# Allegro board Swapback_example.brd
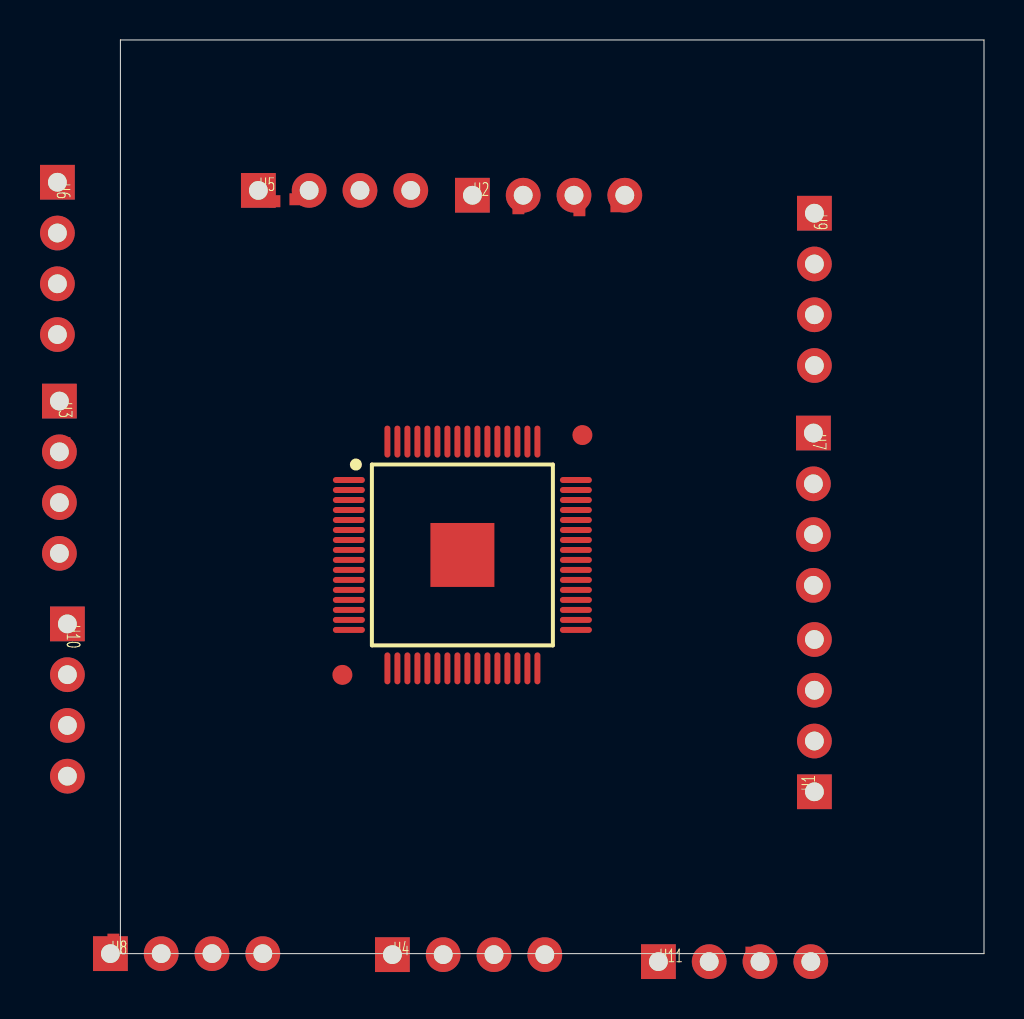
[diagram p0: board, top side]
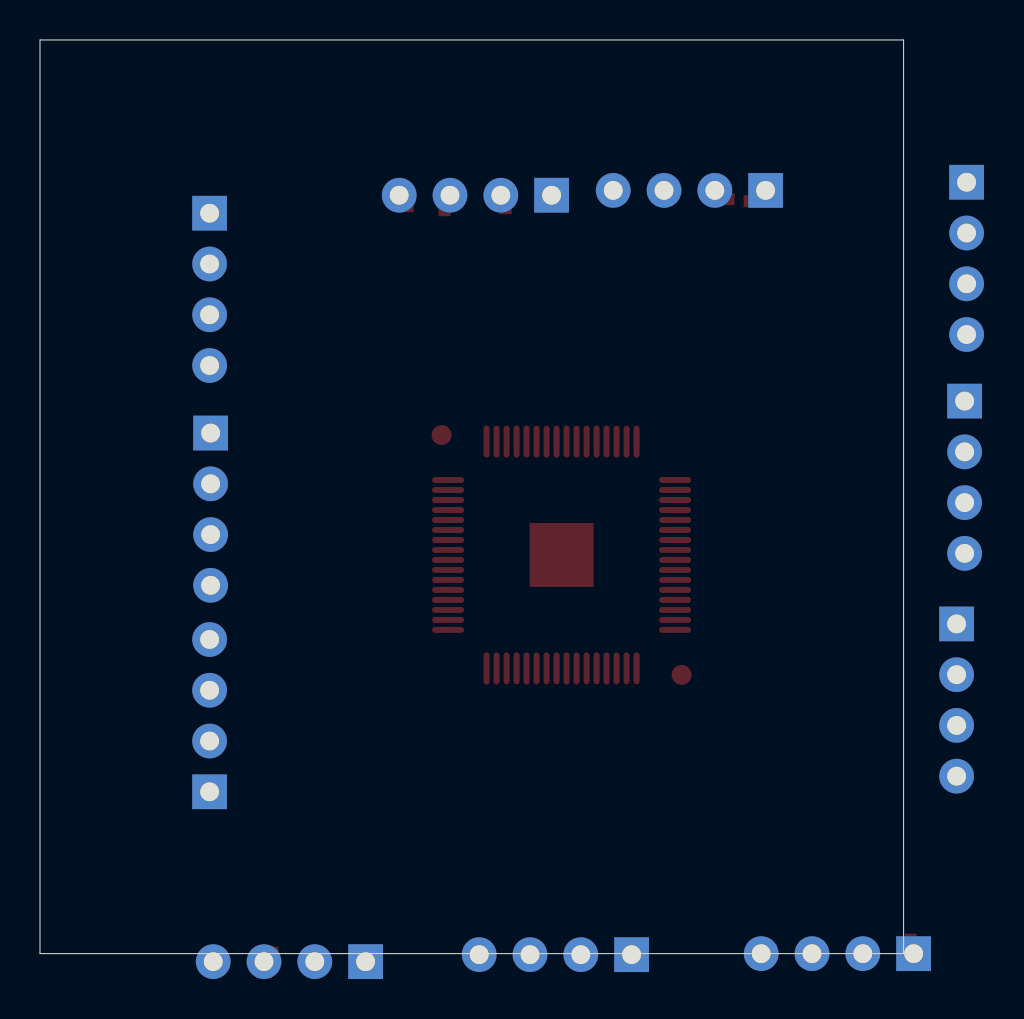
[diagram p1: board, bottom side, seen from below]

Outline 43.18 x 45.72 mm; copper layers: TOP, BOTTOM. Coordinates in mm from the lower left corner of the outline.
Outline path: 0,45.72 0,0 43.18,0 43.18,45.72 0,45.72

## Placement (name value [footprint] x y rotation side)
H1  M20-8890445  [UNASSIGNED]  34.7 8.1 90 top
H2  M20-8890445  [UNASSIGNED]  17.6 37.95 0 top
H3  M20-8890445  [UNASSIGNED]  -3.05 27.65 270 top
H4  M20-8890445  [UNASSIGNED]  13.6 -0.05 0 top
H5  M20-8890445  [UNASSIGNED]  6.9 38.19 0 top
H6  M20-8890445  [UNASSIGNED]  -3.15 38.6 270 top
H7  M20-8890445  [UNASSIGNED]  34.65 26.05 270 top
H8  M20-8890445  [UNASSIGNED]  -0.5 0 0 top
H9  M20-8890445  [UNASSIGNED]  34.7 37.05 270 top
H10  M20-8890445  [UNASSIGNED]  -2.65 16.5 270 top
H11  M20-8890445  [UNASSIGNED]  26.9 -0.4 0 top
TP1  TP .25mm noV  [TESTPAD_P25MM_NOVIA]  24.8 37.4 0 top
TP2  TP .25mm noV  [TESTPAD_P25MM_NOVIA]  22.95 37.2 0 top
TP3  TP .25mm noV  [TESTPAD_P25MM_NOVIA]  19.9 37.3 0 top
TP4  TP .25mm noV  [TESTPAD_P25MM_NOVIA]  17.7 38 0 top
TP5  TP .25mm noV  [TESTPAD_P25MM_NOVIA]  14.5 37.8 0 top
TP6  TP .25mm noV  [TESTPAD_P25MM_NOVIA]  8.75 37.75 0 top
TP7  TP .25mm noV  [TESTPAD_P25MM_NOVIA]  7.7 37.65 0 top
TP8  TP .25mm noV  [TESTPAD_P25MM_NOVIA]  -2.9 38.8 0 top
TP9  TP .25mm noV  [TESTPAD_P25MM_NOVIA]  -2.85 36.15 0 top
TP10  TP .25mm noV  [TESTPAD_P25MM_NOVIA]  -2.85 33.6 0 top
TP11  TP .25mm noV  [TESTPAD_P25MM_NOVIA]  -3.3 31 0 top
TP12  TP .25mm noV  [TESTPAD_P25MM_NOVIA]  -2.9 27.7 0 top
TP13  TP .25mm noV  [TESTPAD_P25MM_NOVIA]  -2.8 25.55 0 top
TP14  TP .25mm noV  [TESTPAD_P25MM_NOVIA]  -3.2 22.45 0 top
TP15  TP .25mm noV  [TESTPAD_P25MM_NOVIA]  -2.8 20.1 0 top
TP16  TP .25mm noV  [TESTPAD_P25MM_NOVIA]  -2.85 16.4 0 top
TP17  TP .25mm noV  [TESTPAD_P25MM_NOVIA]  -2.6 13.95 0 top
TP18  TP .25mm noV  [TESTPAD_P25MM_NOVIA]  -2.55 11.3 0 top
TP19  TP .25mm noV  [TESTPAD_P25MM_NOVIA]  -2.8 8.75 0 top
TP20  TP .25mm noV  [TESTPAD_P25MM_NOVIA]  -0.35 0.7 0 top
TP21  TP .25mm noV  [TESTPAD_P25MM_NOVIA]  2.05 0.3 0 top
TP22  TP .25mm noV  [TESTPAD_P25MM_NOVIA]  4.6 0.35 0 top
TP23  TP .25mm noV  [TESTPAD_P25MM_NOVIA]  7.15 0.25 0 top
TP24  TP .25mm noV  [TESTPAD_P25MM_NOVIA]  13.55 0.4 0 top
TP25  TP .25mm noV  [TESTPAD_P25MM_NOVIA]  16.2 0.3 0 top
TP26  TP .25mm noV  [TESTPAD_P25MM_NOVIA]  18.55 0.35 0 top
TP27  TP .25mm noV  [TESTPAD_P25MM_NOVIA]  21.15 0.45 0 top
TP28  TP .25mm noV  [TESTPAD_P25MM_NOVIA]  31.55 0.05 0 top
TP29  TP .25mm noV  [TESTPAD_P25MM_NOVIA]  34.9 -0.4 0 top
TP30  TP .25mm noV  [TESTPAD_P25MM_NOVIA]  34.8 8 0 top
TP31  TP .25mm noV  [TESTPAD_P25MM_NOVIA]  34.6 10.6 0 top
TP32  TP .25mm noV  [TESTPAD_P25MM_NOVIA]  34.6 13.2 0 top
TP33  TP .25mm noV  [TESTPAD_P25MM_NOVIA]  34.85 15.75 0 top
TP34  TP .25mm noV  [TESTPAD_P25MM_NOVIA]  34.5 18.35 0 top
TP35  TP .25mm noV  [TESTPAD_P25MM_NOVIA]  34.6 20.95 0 top
TP36  TP .25mm noV  [TESTPAD_P25MM_NOVIA]  34.85 23.5 0 top
TP37  TP .25mm noV  [TESTPAD_P25MM_NOVIA]  35.05 26.5 0 top
TP38  TP .25mm noV  [TESTPAD_P25MM_NOVIA]  34.45 29.25 0 top
TP39  TP .25mm noV  [TESTPAD_P25MM_NOVIA]  34.55 31.65 0 top
TP40  TP .25mm noV  [TESTPAD_P25MM_NOVIA]  34.45 34.5 0 top
TP41  TP .25mm noV  [TESTPAD_P25MM_NOVIA]  34.5 37 0 top
U1  TLK2201BIRCPR  [QFP50P1200X1200X120-65N_JUNK]  17.1 19.95 0 top

## Library data of the parts
H1-H11 = HDR_1X4
TP1-TP41 = MINI_TP
U1 = TLK2201B

## Footprints (pads in the part's own frame, mm; a bottom-side part is the same pattern mirrored in y, then rotated)
QFP50P1200X1200X120-65N_JUNK
  round 1 smd: (-6,-6) (6,6)
  oval 1.6x0.3 smd: 1(-5.675,3.75) 2(-5.675,3.25) 3(-5.675,2.75) 4(-5.675,2.25) 5(-5.675,1.75) 6(-5.675,1.25) 7(-5.675,0.75) 8(-5.675,0.25) 9(-5.675,-0.25) 10(-5.675,-0.75) 11(-5.675,-1.25) 12(-5.675,-1.75) 13(-5.675,-2.25) 14(-5.675,-2.75) 15(-5.675,-3.25) 16(-5.675,-3.75) 33(5.675,-3.75) 34(5.675,-3.25) 35(5.675,-2.75) 36(5.675,-2.25) 37(5.675,-1.75) 38(5.675,-1.25) 39(5.675,-0.75) 40(5.675,-0.25) 41(5.675,0.25) 42(5.675,0.75) 43(5.675,1.25) 44(5.675,1.75) 45(5.675,2.25) 46(5.675,2.75) 47(5.675,3.25) 48(5.675,3.75)
  oval 0.3x1.6 smd: 17(-3.75,-5.675) 18(-3.25,-5.675) 19(-2.75,-5.675) 20(-2.25,-5.675) 21(-1.75,-5.675) 22(-1.25,-5.675) 23(-0.75,-5.675) 24(-0.25,-5.675) 25(0.25,-5.675) 26(0.75,-5.675) 27(1.25,-5.675) 28(1.75,-5.675) 29(2.25,-5.675) 30(2.75,-5.675) 31(3.25,-5.675) 32(3.75,-5.675) 49(3.75,5.675) 50(3.25,5.675) 51(2.75,5.675) 52(2.25,5.675) 53(1.75,5.675) 54(1.25,5.675) 55(0.75,5.675) 56(0.25,5.675) 57(-0.25,5.675) 58(-0.75,5.675) 59(-1.25,5.675) 60(-1.75,5.675) 61(-2.25,5.675) 62(-2.75,5.675) 63(-3.25,5.675) 64(-3.75,5.675)
  rect 3.2x3.2 smd: EPAD(0,0)
TESTPAD_P25MM_NOVIA
  rect 0.6x0.6 smd: 1(0,0)
UNASSIGNED
  rect 1.74x1.74 hole 0.94: 1(0,0)
  round 1.74 hole 0.94: 2(2.54,0) 3(5.08,0) 4(7.62,0)

## Nets
GND_SIGNAL: U1.1(GND#1) U1.14(GND#14) U1.21(GND#21) U1.25(GND#25) U1.33(GND#33) U1.46(GND#46) U1.51(GNDA#51) U1.58(GNDA#58) U1.64(GNDPLL) U1.EPAD(GND#EPAD)
VCC: U1.5(VDD#5) U1.10(VDD#10) U1.37(VDD#37) U1.42(VDD#42)
ENABLE: TP26.1 U1.28(ENABLE)
JTDI: TP41.1 U1.48(JTDI)
JTDO: TP25.1 U1.27(JTDO)
JTMS: TP4.1 U1.55(JTMS)
JTRSTN: TP5.1 U1.56(JTRSTN)
LOOPEN: TP21.1 U1.19(LOOPEN)
LOS: TP24.1 U1.26(LOS)
MODSEL: TP18.1 U1.15(MODSEL)
PRBSEN: TP19.1 U1.16(PRBSEN)
RCB0: TP28.1 U1.31(RBC0)
RCB1: TP27.1 U1.30(RBC1)
RCBMODE: TP29.1 U1.32(RBCMODE)
RD0: TP39.1 U1.45(RD0)
RD1: TP38.1 U1.44(RD1)
RD2: TP37.1 U1.43(RD2)
RD3: TP36.1 U1.41(RD3)
RD4: TP35.1 U1.40(RD4)
RD5: TP34.1 U1.39(RD5)
RD6: TP33.1 U1.38(RD6)
RD7: TP32.1 U1.36(RD7)
RD8: TP31.1 U1.35(RD8)
RD9: TP30.1 U1.34(RD9)
REFCLK: TP22.1 U1.22(REFCLK)
RXN: TP2.1 U1.52(RXN)
RXP: TP3.1 U1.54(RXP)
SYNC: TP40.1 U1.47(SYNC/PASS)
SYNCEN: TP23.1 U1.24(SYNCEN)
TCK: TP1.1 U1.49(TCK)
TD0: TP8.1 U1.2(TD0)
TD1: TP9.1 U1.3(TD1)
TD2: TP10.1 U1.4(TD2)
TD3: TP11.1 U1.6(TD3)
TD4: TP12.1 U1.7(TD4)
TD5: TP13.1 U1.8(TD5)
TD6: TP14.1 U1.9(TD6)
TD7: TP15.1 U1.11(TD7)
TD8: TP16.1 U1.12(TD8)
TD9: TP17.1 U1.13(TD9)
TEMP1: H3.1
TEMP2: H3.2
TEMP3: H3.3
TEMP4: H3.4
TEMP5: H4.1
TEMP6: H4.2
TEMP7: H4.3
TEMP8: H4.4
TEMP9: H1.1
TEMP10: H1.2
TEMP11: H1.3
TEMP12: H1.4
TEMP13: H2.1
TEMP14: H2.2
TEMP15: H2.3
TEMP16: H2.4
TEMP17: H5.1
TEMP18: H5.2
TEMP19: H5.3
TEMP20: H5.4
TEMP21: H6.1
TEMP22: H6.2
TEMP23: H6.3
TEMP24: H6.4
TEMP25: H7.1
TEMP26: H7.2
TEMP27: H7.3
TEMP28: H7.4
TEMP29: H8.1
TEMP30: H8.2
TEMP31: H8.3
TEMP32: H8.4
TEMP33: H9.1
TEMP34: H9.2
TEMP35: H9.3
TEMP36: H9.4
TEMP37: H10.1
TEMP38: H10.2
TEMP39: H10.3
TEMP40: H10.4
TEMP41: H11.1
TEMP42: H11.2
TEMP43: H11.3
TEMP44: H11.4
TESTEN: TP20.1 U1.17(TESTEN)
TXN: TP6.1 U1.61(TXN)
TXP: TP7.1 U1.62(TXP)
N09924: U1.50(VDD#50) U1.53(VDDA#53) U1.57(VDDA#57) U1.59(VDDA#59) U1.60(VDDA#60) U1.63(VDD#63)
N10926: U1.18(VDDPLL) U1.20(VDD#20) U1.23(VDD#23) U1.29(VDD#29)
